# EAGLE board pcbqr (EAGLE 5.10)
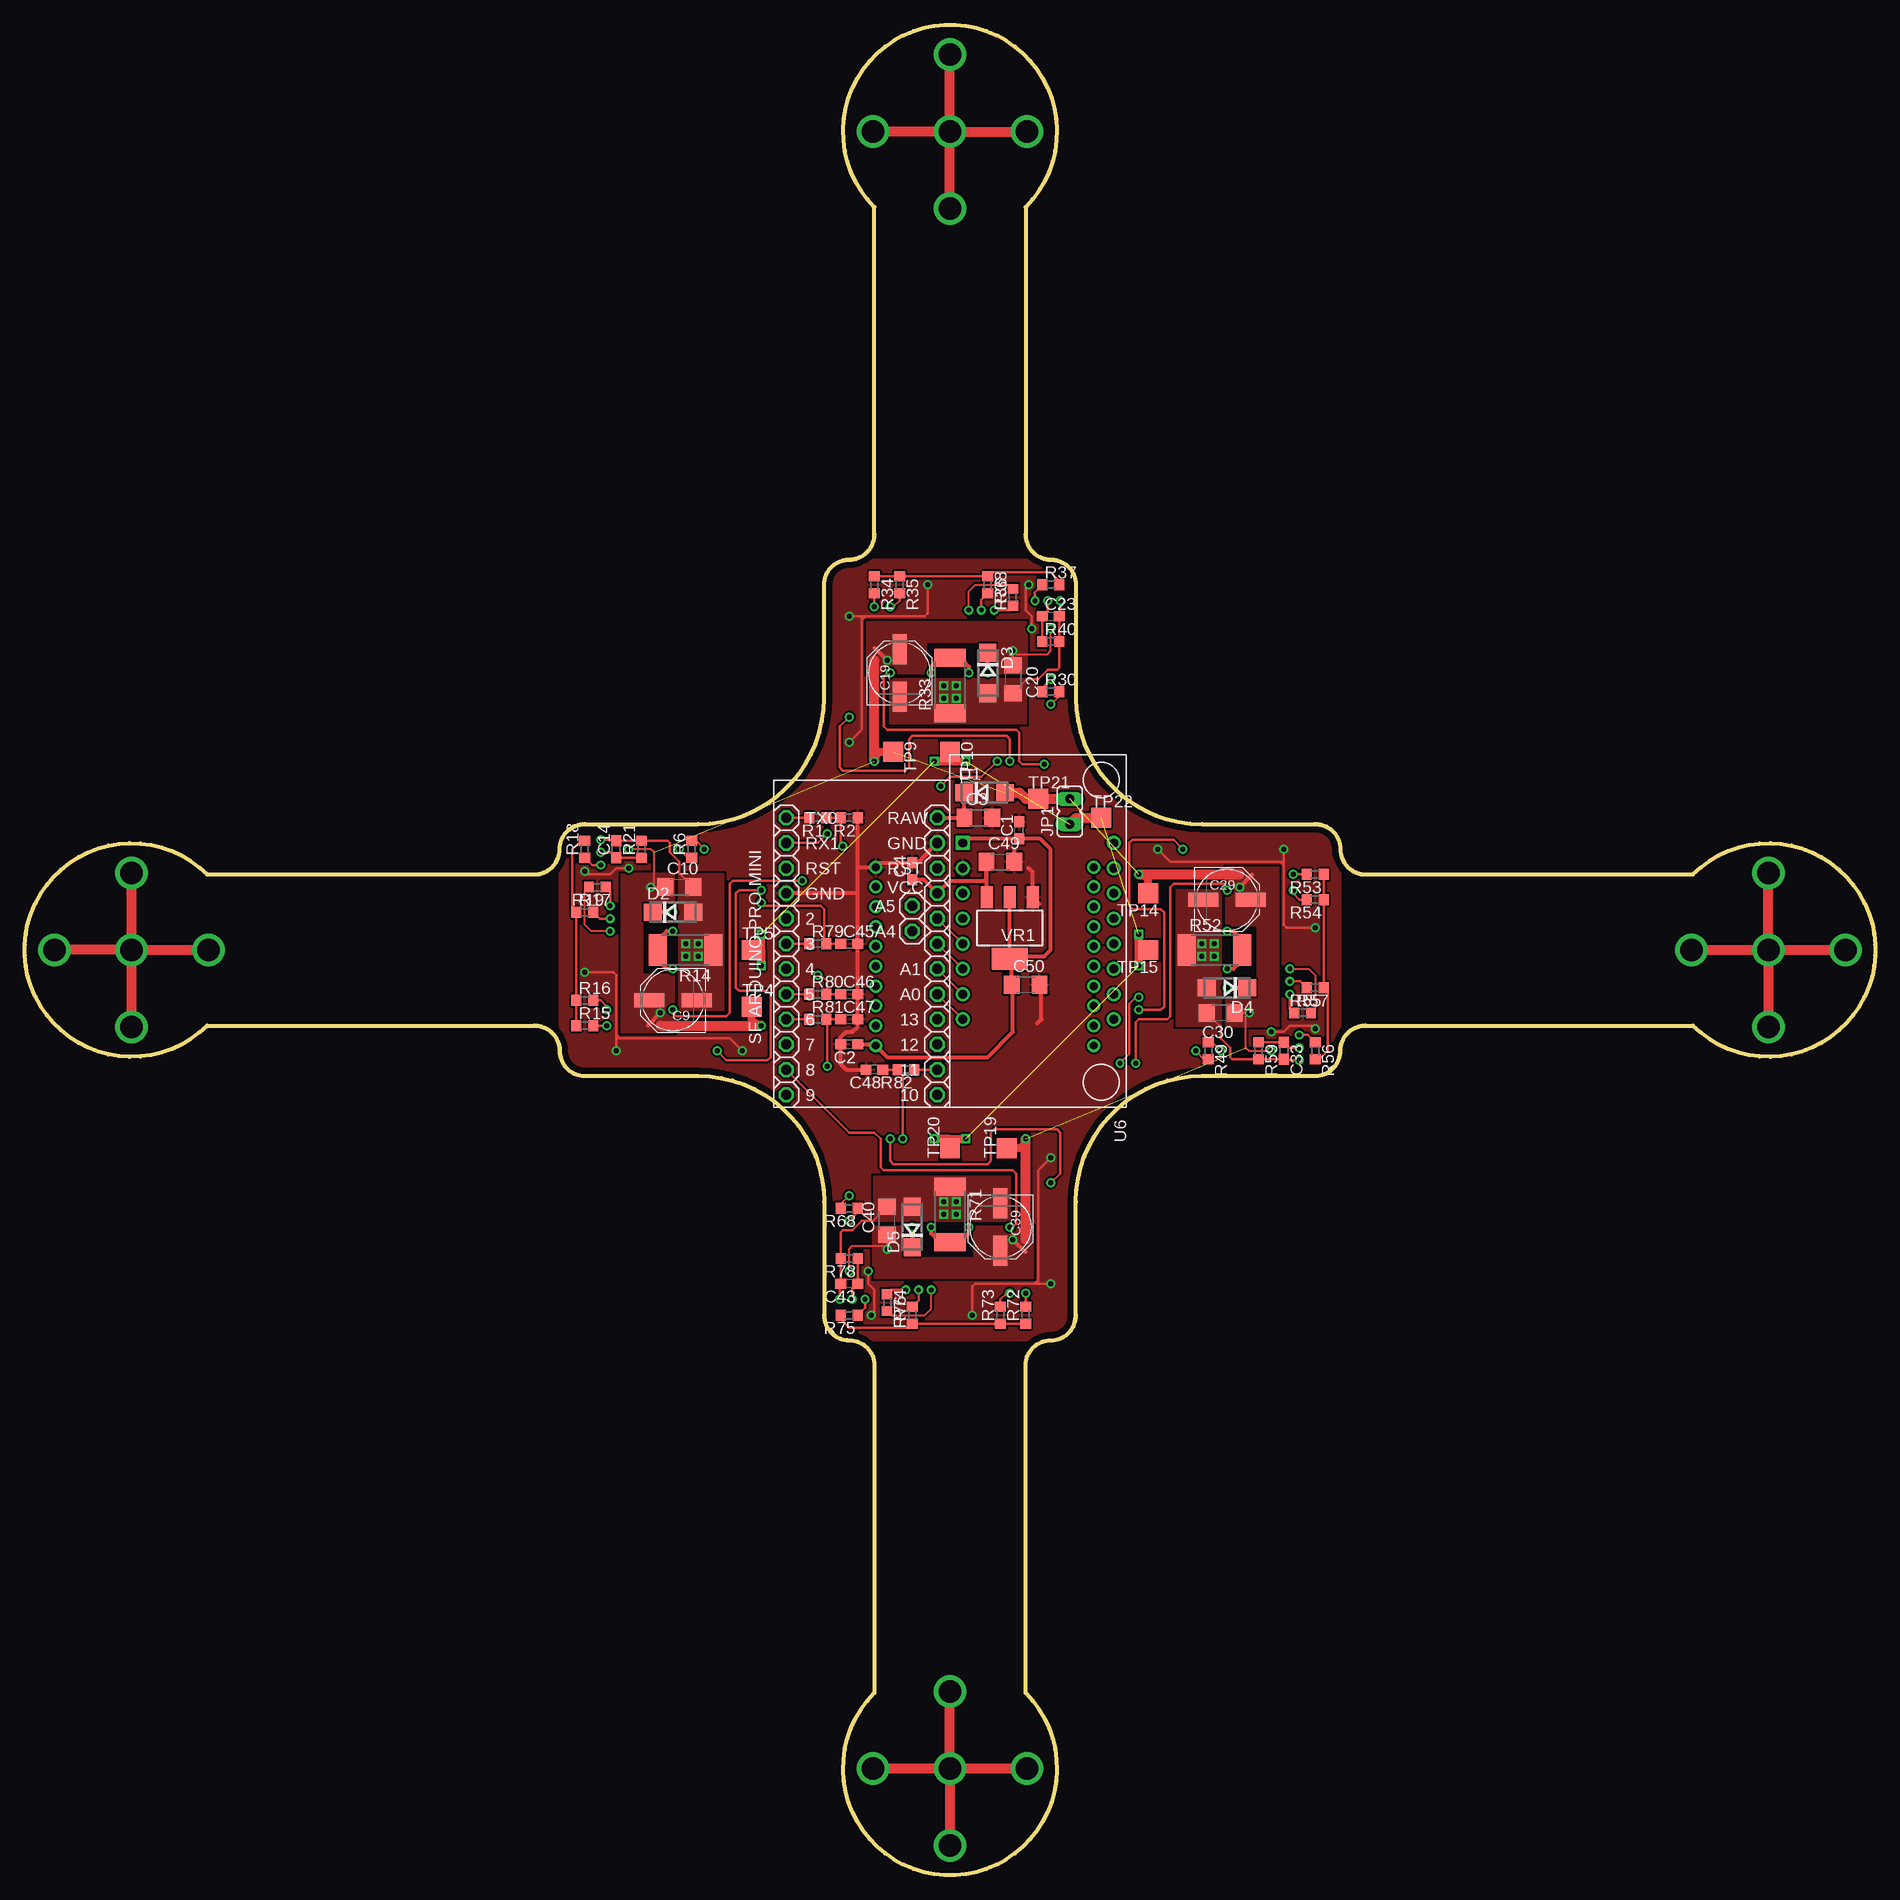
[diagram p0: board, top side]
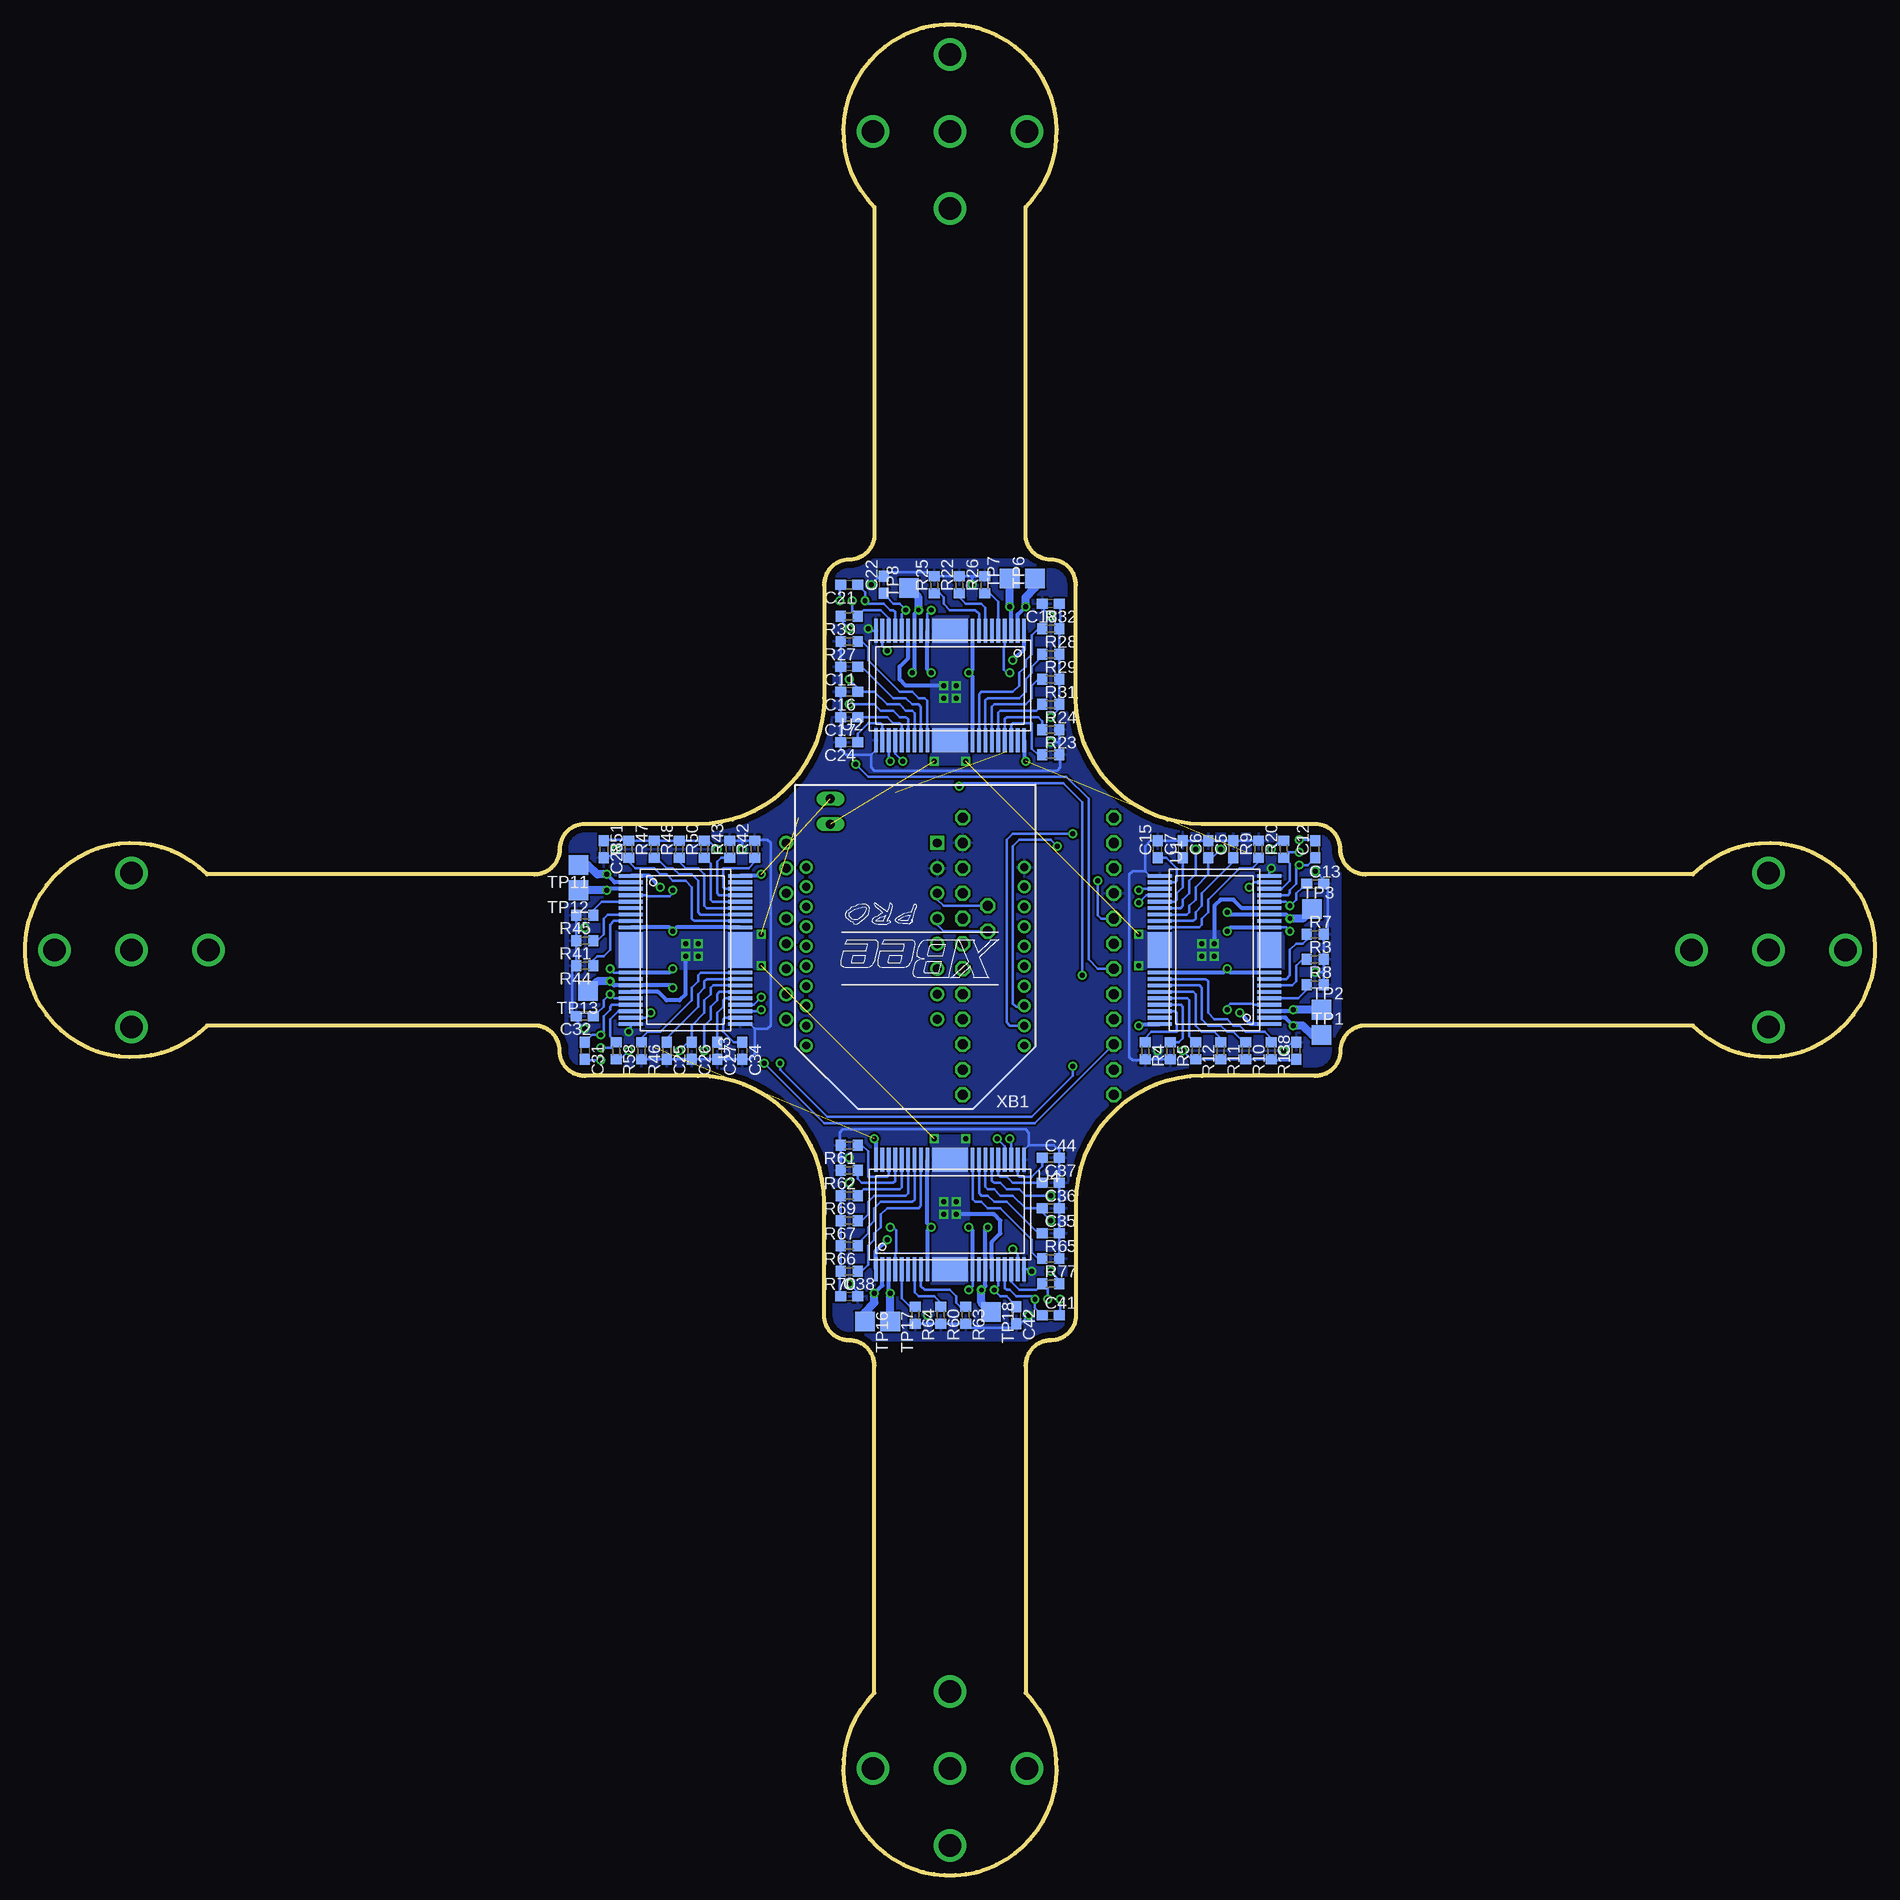
[diagram p1: board, bottom side, seen from below]

Size 186.63 x 186.63 mm. Coordinates in mm from the lower left corner, seen from the top.
Outline: 18.38,100.93 51.4,100.93 arc90 53.94,103.47 arc-90 56.48,106.01 67.91,106.01 arc90 80.61,118.71 80.61,130.14 arc-90 83.15,132.68 arc90 85.69,135.22 85.69,168.24 arc-270 100.93,168.24 100.93,135.22 arc90 103.47,132.68 arc-90 106.01,130.14 106.01,118.71 arc90 118.71,106.01 130.14,106.01 arc-90 132.68,103.47 arc90 135.22,100.93 168.24,100.93 arc-270 168.24,85.69 135.22,85.69 arc90 132.68,83.15 arc-90 130.14,80.61 118.71,80.61 arc90 106.01,67.91 106.01,56.48 arc-90 103.47,53.94 arc90 100.93,51.4 100.93,18.38 arc-270 85.69,18.38 85.69,51.4 arc90 83.15,53.94 arc-90 80.61,56.48 80.61,67.91 arc90 67.91,80.61 56.48,80.61 arc-90 53.94,83.15 arc90 51.4,85.69 18.38,85.69 arc-270 18.38,100.93
Copper layers (1*16): Top 0.035mm / dielectric 1.5mm / Bottom 0.035mm
Design rules "default *": minimum track width 8mil, minimum drill 19mil, track to track 8mil, track to pad 8mil, pad to pad 8mil, via to via 8mil, smd to smd 1mil, copper to edge 25mil, drill to drill 8mil, minimum pad ring 10mil, minimum via ring 8mil, stop-mask expansion 4mil, vias tented up to drill 0mil, thermal gap 10mil

## Footprints (pad centres in the part's own frame; a part is rotated, then mirrored left to right if it is on the bottom)
C0603 = smd 1.1 x 1: 1 -0.85,0; 2 0.85,0
C1206 = smd 1.6 x 1.8: 1 -1.4,0; 2 1.4,0
PANASONIC_D = smd 3 x 1.4: + 2.4,0; - -2.4,0
SMA = smd 1.8 x 1.7: A 2.05,0; C -2.05,0
JP1 = drill 0.914 long: 1 0,-1.27; 2 0,1.27
R0603 = smd 1 x 1.1: 1 -0.85,0; 2 0.85,0
R2512 = smd 1.8 x 3.2: 1 -2.8,0; 2 2.8,0
TP20SQ = smd 2 x 2: TP 0,0
HSOP36-P-450-0.65 = smd 0.38 x 2.4: 1 -7.475,-5.525; 2 -6.825,-5.525; 3 -6.175,-5.525; 4 -5.525,-5.525; 5 -4.875,-5.525; 6 -4.225,-5.525; 7 -3.575,-5.525; 8 -2.925,-5.525; 9 -2.275,-5.525; 10 2.275,-5.525; 11 2.925,-5.525; 12 3.575,-5.525; 13 4.225,-5.525; 14 4.875,-5.525; 15 5.525,-5.525; 16 6.175,-5.525; 17 6.825,-5.525; 18 7.475,-5.525; 19 7.475,5.525; 20 6.825,5.525; 21 6.175,5.525; 22 5.525,5.525; 23 4.875,5.525; 24 4.225,5.525; 25 3.575,5.525; 26 2.925,5.525; 27 2.275,5.525; 28 -2.275,5.525; 29 -2.925,5.525; 30 -3.575,5.525; 31 -4.225,5.525; 32 -4.875,5.525; 33 -5.525,5.525; 34 -6.175,5.525; 35 -6.825,5.525; 36 -7.475,5.525 | smd 3.6 x 2.4: P1 0,-5.525; P2 0,5.525
ARDUINO_PRO_MINI = drill 1.016 octagon: 2 0,17.78; 3 0,15.24; 4 0,12.7; 5 0,10.16; 6 0,7.62; 7 0,5.08; 8 0,2.54; 9 0,0; 10 15.24,0; 11 15.24,2.54; 12 15.24,5.08; 13 15.24,7.62; A0 15.24,10.16; A1 15.24,12.7; A2 15.24,15.24; A3 15.24,17.78; A4 12.7,16.51; A5 12.7,19.05; GND 0,20.32; GND@2 15.24,25.4; RAW 15.24,27.94; RST 0,22.86; RST@2 15.24,22.86; RX1 0,25.4; TX0 0,27.94; VCC 15.24,20.32
RAZOR_IMU = drill 0.9 square: 1 -8.89,-7.62 | drill 0.9 round: 2 -6.35,-7.62; 3 -3.81,-7.62; 4 -1.27,-7.62; 5 1.27,-7.62; 6 3.81,-7.62; 7 6.35,-7.62; 8 8.89,-7.62; 9 8.89,7.62; 10 6.35,7.62; 11 3.81,7.62; 12 1.27,7.62; 13 -1.27,7.62; 14 -3.81,7.62; 15 -6.35,7.62; 16 -8.89,7.62
SOT-223 = smd 1.219 x 2.235: 1 -2.311,-3.099; 2 0,-3.099; 3 2.311,-3.099 | smd 3.6 x 2.2: 4 0,3.099
XBEE-PRO = drill 0.8 pad 1.27 round: 1 -11,9; 2 -11,7; 3 -11,5; 4 -11,3; 5 -11,1; 6 -11,-1; 7 -11,-3; 8 -11,-5; 9 -11,-7; 10 -11,-9; 11 11,-9; 12 11,-7; 13 11,-5; 14 11,-3; 15 11,-1; 16 11,1; 17 11,3; 18 11,5; 19 11,7; 20 11,9

## Placement (x,y rotation side)
C1  0.1uF  [C0603]  100.3,105.38 90 top
C2  1uF  [C0603]  83.15,83.79 180 top
C3  10uF  [C1206]  96.17,106.65 0 top
C4  1uF  [C0603]  89.5,101.25 90 top
C5  100pF  [C0603]  64.74,103.47 90 bottom
C6  1uF  [C0603]  67.28,103.47 90 bottom
C7  0.1uF  [C0603]  69.82,103.47 90 bottom
C8  1uF  [C0603]  58.39,83.15 90 bottom
C9  68uF  [PANASONIC_D]  65.37,88.23 180 top
C10  10uF  [C1206]  66.01,99.66 0 top
C11  100pF  [C0603]  103.47,121.89 180 bottom
C12  DNP  [C0603]  56.48,103.47 90 bottom
C13  0.1uF  [C0603]  56.48,99.98 0 bottom
C14  0.1uF  [C0603]  59.66,103.47 90 top
C15  DNP  [C0603]  72.36,103.47 90 bottom
C16  1uF  [C0603]  103.47,119.35 180 bottom
C17  0.1uF  [C0603]  103.47,116.81 180 bottom
C18  1uF  [C0603]  83.15,128.24 180 bottom
C19  68uF  [PANASONIC_D]  88.23,121.25 90 top
C20  10uF  [C1206]  99.66,120.62 270 top
C21  DNP  [C0603]  103.47,130.14 180 bottom
C22  0.1uF  [C0603]  99.98,130.14 90 bottom
C23  0.1uF  [C0603]  103.47,126.97 0 top
C24  DNP  [C0603]  103.47,114.27 180 bottom
C25  100pF  [C0603]  121.89,83.15 270 bottom
C26  1uF  [C0603]  119.35,83.15 270 bottom
C27  0.1uF  [C0603]  116.81,83.15 270 bottom
C28  1uF  [C0603]  128.24,103.47 270 bottom
C29  68uF  [PANASONIC_D]  121.25,98.39 0 top
C30  10uF  [C1206]  120.62,86.96 180 top
C31  DNP  [C0603]  130.14,83.15 270 bottom
C32  0.1uF  [C0603]  130.14,86.65 180 bottom
C33  0.1uF  [C0603]  126.97,83.15 270 top
C34  DNP  [C0603]  114.27,83.15 270 bottom
C35  100pF  [C0603]  83.15,64.74 0 bottom
C36  1uF  [C0603]  83.15,67.28 0 bottom
C37  0.1uF  [C0603]  83.15,69.82 0 bottom
C38  1uF  [C0603]  103.47,58.39 0 bottom
C39  68uF  [PANASONIC_D]  98.39,65.37 270 top
C40  10uF  [C1206]  86.96,66.01 90 top
C41  DNP  [C0603]  83.15,56.48 0 bottom
C42  0.1uF  [C0603]  86.65,56.48 270 bottom
C43  0.1uF  [C0603]  83.15,59.66 180 top
C44  DNP  [C0603]  83.15,72.36 0 bottom
C45  0.1uF  [C0603]  83.15,93.95 0 top
C46  0.1uF  [C0603]  83.15,88.87 0 top
C47  0.1uF  [C0603]  83.15,86.33 0 top
C48  0.1uF  [C0603]  85.69,81.25 180 top
C49  10uF  [C1206]  98.39,102.2 0 top
C50  10uF  [C1206]  100.93,89.82 0 top
D1  SCHOTTKY_SMA  [SMA]  96.81,109.19 0 top
D2  SCHOTTKY_SMA  [SMA]  65.37,97.12 0 top
D3  SCHOTTKY_SMA  [SMA]  97.12,121.25 270 top
D4  SCHOTTKY_SMA  [SMA]  121.25,89.5 180 top
D5  SCHOTTKY_SMA  [SMA]  89.5,65.37 90 top
JP1  [JP1]  105.38,107.28 0 top
R1  1.69k  [R0603]  79.98,106.65 180 top
R2  3.3k  [R0603]  83.15,106.65 180 top
R3  DNP  [R0603]  56.48,92.36 0 bottom
R4  0  [R0603]  73.63,83.15 270 bottom
R5  0  [R0603]  71.09,83.15 270 bottom
R6  240k  [R0603]  67.28,103.47 90 top
R7  DNP  [R0603]  56.48,94.9 0 bottom
R8  0  [R0603]  56.48,89.82 0 bottom
R9  10k  [R0603]  62.2,103.47 90 bottom
R10  0  [R0603]  63.47,83.15 270 bottom
R11  0  [R0603]  66.01,83.15 270 bottom
R12  DNP  [R0603]  68.55,83.15 270 bottom
R13  10k  [R0603]  60.93,83.15 270 bottom
R14  0.2, 2W  [R2512]  66.64,93.31 180 top
R15  10k  [R0603]  56.48,85.69 0 top
R16  10k  [R0603]  56.48,88.23 0 top
R17  10k  [R0603]  56.48,97.12 0 top
R18  0  [R0603]  56.48,103.47 90 top
R19  10k  [R0603]  57.75,99.66 180 top
R20  10k  [R0603]  59.66,103.47 90 bottom
R21  10k  [R0603]  62.2,103.47 90 top
R22  DNP  [R0603]  92.36,130.14 90 bottom
R23  0  [R0603]  83.15,113 0 bottom
R24  0  [R0603]  83.15,115.54 0 bottom
R25  DNP  [R0603]  94.9,130.14 90 bottom
R26  0  [R0603]  89.82,130.14 90 bottom
R27  10k  [R0603]  103.47,124.43 180 bottom
R28  0  [R0603]  83.15,123.16 0 bottom
R29  0  [R0603]  83.15,120.62 0 bottom
R30  240k  [R0603]  103.47,119.35 0 top
R31  DNP  [R0603]  83.15,118.08 0 bottom
R32  10k  [R0603]  83.15,125.7 0 bottom
R33  0.2, 2W  [R2512]  93.31,119.98 90 top
R34  10k  [R0603]  85.69,130.14 270 top
R35  10k  [R0603]  88.23,130.14 270 top
R36  10k  [R0603]  97.12,130.14 270 top
R37  0  [R0603]  103.47,130.14 0 top
R38  10k  [R0603]  99.66,128.87 90 top
R39  10k  [R0603]  103.47,126.97 180 bottom
R40  10k  [R0603]  103.47,124.43 0 top
R41  DNP  [R0603]  130.14,94.27 180 bottom
R42  0  [R0603]  113,103.47 90 bottom
R43  0  [R0603]  115.54,103.47 90 bottom
R44  DNP  [R0603]  130.14,91.73 180 bottom
R45  0  [R0603]  130.14,96.81 180 bottom
R46  10k  [R0603]  124.43,83.15 270 bottom
R47  0  [R0603]  123.16,103.47 90 bottom
R48  0  [R0603]  120.62,103.47 90 bottom
R49  240k  [R0603]  119.35,83.15 270 top
R50  DNP  [R0603]  118.08,103.47 90 bottom
R51  10k  [R0603]  125.7,103.47 90 bottom
R52  0.2, 2W  [R2512]  119.98,93.31 0 top
R53  10k  [R0603]  130.14,100.93 180 top
R54  10k  [R0603]  130.14,98.39 180 top
R55  10k  [R0603]  130.14,89.5 180 top
R56  0  [R0603]  130.14,83.15 270 top
R57  10k  [R0603]  128.87,86.96 0 top
R58  10k  [R0603]  126.97,83.15 270 bottom
R59  10k  [R0603]  124.43,83.15 270 top
R60  DNP  [R0603]  94.27,56.48 270 bottom
R61  0  [R0603]  103.47,73.63 180 bottom
R62  0  [R0603]  103.47,71.09 180 bottom
R63  DNP  [R0603]  91.73,56.48 270 bottom
R64  0  [R0603]  96.81,56.48 270 bottom
R65  10k  [R0603]  83.15,62.2 0 bottom
R66  0  [R0603]  103.47,63.47 180 bottom
R67  0  [R0603]  103.47,66.01 180 bottom
R68  240k  [R0603]  83.15,67.28 180 top
R69  DNP  [R0603]  103.47,68.55 180 bottom
R70  10k  [R0603]  103.47,60.93 180 bottom
R71  0.2, 2W  [R2512]  93.31,66.64 270 top
R72  10k  [R0603]  100.93,56.48 90 top
R73  10k  [R0603]  98.39,56.48 90 top
R74  10k  [R0603]  89.5,56.48 90 top
R75  0  [R0603]  83.15,56.48 180 top
R76  10k  [R0603]  86.96,57.75 270 top
R77  10k  [R0603]  83.15,59.66 0 bottom
R78  10k  [R0603]  83.15,62.2 180 top
R79  3k  [R0603]  79.98,93.95 0 top
R80  3k  [R0603]  79.98,88.87 0 top
R81  3k  [R0603]  79.98,86.33 0 top
R82  3k  [R0603]  88.87,81.25 180 top
TP1  TPTP20SQ  [TP20SQ]  55.85,84.74 0 bottom
TP2  TPTP20SQ  [TP20SQ]  55.85,87.28 0 bottom
TP3  TPTP20SQ  [TP20SQ]  56.8,97.44 0 bottom
TP4  TPTP20SQ  [TP20SQ]  73.31,87.6 0 top
TP5  TPTP20SQ  [TP20SQ]  73.31,93.31 0 top
TP6  TPTP20SQ  [TP20SQ]  84.74,130.78 90 bottom
TP7  TPTP20SQ  [TP20SQ]  87.28,130.78 90 bottom
TP8  TPTP20SQ  [TP20SQ]  97.44,129.83 90 bottom
TP9  TPTP20SQ  [TP20SQ]  87.6,113.32 270 top
TP10  TPTP20SQ  [TP20SQ]  93.31,113.32 270 top
TP11  TPTP20SQ  [TP20SQ]  130.78,101.89 180 bottom
TP12  TPTP20SQ  [TP20SQ]  130.78,99.35 180 bottom
TP13  TPTP20SQ  [TP20SQ]  129.83,89.19 180 bottom
TP14  TPTP20SQ  [TP20SQ]  113.32,99.03 180 top
TP15  TPTP20SQ  [TP20SQ]  113.32,93.31 180 top
TP16  TPTP20SQ  [TP20SQ]  101.89,55.85 270 bottom
TP17  TPTP20SQ  [TP20SQ]  99.35,55.85 270 bottom
TP18  TPTP20SQ  [TP20SQ]  89.19,56.8 270 bottom
TP19  TPTP20SQ  [TP20SQ]  99.03,73.31 90 top
TP20  TPTP20SQ  [TP20SQ]  93.31,73.31 90 top
TP21  TPTP20SQ  [TP20SQ]  102.2,108.55 0 top
TP22  TPTP20SQ  [TP20SQ]  108.55,106.65 0 top
U1  TB6588FG  [HSOP36-P-450-0.65]  66.64,93.31 90 bottom
U2  TB6588FG  [HSOP36-P-450-0.65]  93.31,119.98 180 bottom
U3  TB6588FG  [HSOP36-P-450-0.65]  119.98,93.31 270 bottom
U4  TB6588FG  [HSOP36-P-450-0.65]  93.31,66.64 0 bottom
U5  ARDUINOPROMINI  [ARDUINO_PRO_MINI]  76.8,78.71 0 top
U6  RAZOR_IMU  [RAZOR_IMU]  102.2,95.22 270 top
VR1  LM1117  [SOT-223]  99.35,95.54 180 top
XB1  XBEE-PRO  [XBEE-PRO]  96.81,92.68 180 bottom

## Library data of the parts
C1-C50 R1-R82 = rcl
D1-D5 U1-U4 U6 VR1 = sc_usercreated
JP1 = jumper
TP1-TP22 = testpad
U5 = charleses_parts_bin
XB1 = maxstream

## Nets
+3V3: C1.1 C2.1 C50.1 U6.1 VR1.2 VR1.4 XB1.1
+5V: C4.1 C49.1 U5.VCC VR1.3
AX: U5.A0 U6.8
AY: U5.A1 U6.7
AZ: U5.A2 U6.6
DIR1: U1.4 U5.2
DIR2: U2.4 U5.4
DIR3: U3.4 U5.7
DIR4: U4.4 U5.8
GND: C1.2 C2.2 C3.2 C4.2 C5.2 C6.2 C7.2 C8.2 C11.2 C13.2 C15.2 C16.2 C17.2 C18.2 C22.2 C24.2 C25.2 C26.2 C27.2 C28.2 C32.2 C34.2 C35.2 C36.2 C37.2 C38.2 C42.2 C44.2 C45.2 C46.2 C47.2 C48.2 C49.2 C50.2 R2.1 R3.2 R4.2 R5.2 R7.2 R8.2 R9.2 R22.2 R23.2 R24.2 R25.2 R26.2 R27.2 R41.2 R42.2 R43.2 R44.2 R45.2 R46.2 R60.2 R61.2 R62.2 R63.2 R64.2 R65.2 U1.18 U1.19 U2.18 U2.19 U3.18 U3.19 U4.18 U4.19 U5.GND U5.GND@2 U6.2 VR1.1 XB1.10
GX: U5.A4 U6.4
GY: U5.A5 U6.3
GZ: U5.A3 U6.5
MAG1: C45.1 R79.2 U1.22
MAG1R: R79.1 U5.3
MAG2: C46.1 R80.2 U2.22
MAG2R: R80.1 U5.5
MAG3: C47.1 R81.2 U3.22
MAG3R: R81.1 U5.6
MAG4: C48.1 R82.2 U4.22
MAG4R: R82.1 U5.11
N$1: R1.1 R2.2 XB1.3
N$2: C3.1 D1.C U5.RAW
N$3: R15.1 R16.1 R17.1 R18.2
N$4: R14.2 R19.2 U1.9 U1.10 U1.28
N$5: R15.2 TP1.TP U1.2
N$6: R16.2 TP2.TP U1.3
N$7: D2.C R17.2 TP3.TP U1.12
N$8: R8.1 U1.5
N$9: R7.1 U1.8
N$10: R6.2 U1.24
N$11: R5.1 U1.33
N$12: R4.1 U1.34
N$13: R3.1 U1.7
N$14: C5.1 U1.26
N$15: R9.1 U1.27
N$16: R10.1 U1.30
N$17: R11.1 U1.31
N$18: C6.1 R6.1 U1.25
N$19: R12.1 U1.32
N$20: C7.1 U1.23
N$21: R13.1 U1.29
N$22: C14.1 R20.1 R21.1 U1.16
N$23: R33.2 R38.2 U2.9 U2.10 U2.28
N$24: C12.1 R18.1 U1.15
N$25: C13.1 R19.1 U1.14
N$26: C15.1 U1.20
N$27: R34.2 TP6.TP U2.2
N$28: R35.2 TP7.TP U2.3
N$29: D3.C R36.2 TP8.TP U2.12
N$30: R26.1 U2.5
N$31: R25.1 U2.8
N$32: R24.1 U2.33
N$33: R23.1 U2.34
N$34: R22.1 U2.7
N$35: C11.1 U2.26
N$36: R27.1 U2.27
N$37: R28.1 U2.30
N$38: R29.1 U2.31
N$39: R30.2 U2.24
N$40: C16.1 R30.1 U2.25
N$41: C17.1 U2.23
N$42: R31.1 U2.32
N$43: R32.1 U2.29
N$44: R34.1 R35.1 R36.1 R37.2
N$45: C21.1 R37.1 U2.15
N$46: C22.1 R38.1 U2.14
N$47: C23.1 R39.1 R40.1 U2.16
N$48: C24.1 U2.20
N$49: R52.2 R57.2 U3.9 U3.10 U3.28
N$50: R53.2 TP11.TP U3.2
N$51: R54.2 TP12.TP U3.3
N$52: D4.C R55.2 TP13.TP U3.12
N$53: R45.1 U3.5
N$54: R44.1 U3.8
N$55: R43.1 U3.33
N$56: R42.1 U3.34
N$57: R41.1 U3.7
N$58: C25.1 U3.26
N$59: R46.1 U3.27
N$60: R47.1 U3.30
N$61: R48.1 U3.31
N$62: R49.2 U3.24
N$63: C26.1 R49.1 U3.25
N$64: C27.1 U3.23
N$65: R50.1 U3.32
N$66: R51.1 U3.29
N$67: R53.1 R54.1 R55.1 R56.2
N$68: C31.1 R56.1 U3.15
N$69: C32.1 R57.1 U3.14
N$70: C33.1 R58.1 R59.1 U3.16
N$71: C34.1 U3.20
N$72: R71.2 R76.2 U4.9 U4.10 U4.28
N$73: R72.2 TP16.TP U4.2
N$74: R73.2 TP17.TP U4.3
N$75: D5.C R74.2 TP18.TP U4.12
N$76: R64.1 U4.5
N$77: R63.1 U4.8
N$78: R62.1 U4.33
N$79: R61.1 U4.34
N$80: R60.1 U4.7
N$81: C35.1 U4.26
N$82: R65.1 U4.27
N$83: R66.1 U4.30
N$84: R67.1 U4.31
N$85: R68.2 U4.24
N$86: C36.1 R68.1 U4.25
N$87: C37.1 U4.23
N$88: R69.1 U4.32
N$89: R70.1 U4.29
N$90: R72.1 R73.1 R74.1 R75.2
N$91: C41.1 R75.1 U4.15
N$92: C42.1 R76.1 U4.14
N$93: C43.1 R77.1 R78.1 U4.16
N$94: C44.1 U4.20
UC2XB: R1.2 U5.TX0
V+: C9.+ C10.1 C19.+ C20.1 C29.+ C30.1 C39.+ C40.1 D1.A JP1.2 R20.2 R39.2 R58.2 R77.2 TP4.TP TP9.TP TP14.TP TP19.TP TP21.TP U1.1 U1.17 U1.36 U2.1 U2.17 U2.36 U3.1 U3.17 U3.36 U4.1 U4.17 U4.36
V-: C9.- C10.2 C12.2 C14.2 C19.- C20.2 C21.2 C23.2 C29.- C30.2 C31.2 C33.2 C39.- C40.2 C41.2 C43.2 D2.A D3.A D4.A D5.A JP1.1 R14.1 R21.2 R33.1 R40.2 R52.1 R59.2 R71.1 R78.2 TP5.TP TP10.TP TP15.TP TP20.TP TP22.TP U1.13 U1.P1 U1.P2 U2.13 U2.P1 U2.P2 U3.13 U3.P1 U3.P2 U4.13 U4.P1 U4.P2
VR1: C8.1 R10.2 R11.2 R12.2 R13.2 U1.21
VR2: C18.1 R28.2 R29.2 R31.2 R32.2 U2.21
VR3: C28.1 R47.2 R48.2 R50.2 R51.2 U3.21
VR4: C38.1 R66.2 R67.2 R69.2 R70.2 U4.21
XB2UC: U5.RX1 XB1.2

## Tracks (layer width: path | path; a pad name or v marks a point on that pad's centre or on a via)
+3V3
  Top 0.406: VR1.4 99.53,92.25 C50.1 99.66,89.69 99.66,85.06 97.12,82.52 86.96,82.52 XB1.1 85.7,83.79 C2.1 | VR1.4 VR1.2 | VR1.4 99.59,92.68 102.84,92.68 103.47,93.31 103.47,103.47 102.42,104.53 C1.1 95,104.53 U6.1
+5V
  Top 0.406: C4.1 90.67,100.4 U5.VCC 93.31,100.3 96.81,100.3 96.99,100.48 C49.1 96.99,98.68 VR1.3
AX
  Top 0.254: U5.A0 U6.8
AY
  Top 0.254: U5.A1 U6.7
AZ
  Top 0.254: U5.A2 U6.6
DIR1  (via drill 0.5)
  Top 0.254: v65.37,87.28 65.37,86.96 65.69,86.65 70.77,86.65 71.09,86.96 71.09,99.98 71.4,100.3 v78.39,100.3
  Bottom 0.254: U1.4 62.7,87.79 62.83,87.91 65.06,87.91 65.37,87.6 v65.37,87.28 | v78.39,100.3 78.39,96.8 78.07,96.49 U5.2
DIR2  (via drill 0.5)
  Top 0.254: v87.28,121.25 86.96,121.25 86.64,120.94 86.64,115.86 86.96,115.54 99.98,115.54 100.3,115.22 100.3,112.36 100.62,112.04 v102.84,112.04
  Bottom 0.254: U2.4 87.79,123.92 87.92,123.79 87.92,121.57 87.6,121.25 v87.28,121.25 | U5.4 78.39,91.41 79.34,92.36 79.34,108.55 81.56,110.78 101.57,110.78 v102.84,112.04
DIR3  (via drill 0.5)
  Top 0.254: v121.25,99.35 121.25,99.66 120.94,99.98 115.86,99.98 115.54,99.66 115.54,86.65 115.22,86.33 112.36,86.33 112.05,86.01 v112.05,81.88
  Bottom 0.254: U3.4 123.92,98.84 123.79,98.71 121.57,98.71 121.25,99.03 v121.25,99.35 | U5.7 84.74,75.85 106.01,75.85 v112.05,81.88
DIR4  (via drill 0.5)
  Top 0.254: v99.34,65.37 99.66,65.37 99.98,65.69 99.98,70.77 99.66,71.09 86.64,71.09 86.33,71.4 86.33,74.26 85.69,74.9 83.15,74.9 U5.8
  Bottom 0.254: U4.4 98.84,62.7 98.71,62.83 98.71,65.06 99.03,65.37 v99.34,65.37
GND  (via drill 0.5)
  Top 0.254: v60.93,101.57 59.66,101.57 59.02,100.93 56.8,100.93 v56.48,101.25 | 59.66,84.74 59.97,84.42 71.09,84.42 v72.36,83.15 | 59.66,84.74 59.66,90.77 59.34,91.09 v56.48,91.09 | v59.66,83.15 59.66,84.74 | v101.57,125.7 101.57,126.97 100.93,127.6 100.93,129.82 v101.25,130.14 | 84.74,126.97 84.42,126.65 84.42,115.54 v83.15,114.27 | 84.74,126.97 90.77,126.97 91.09,127.29 v91.09,130.14 | 84.74,126.97 v83.15,126.97 | v125.7,85.06 126.97,85.06 127.6,85.69 129.83,85.69 v130.14,85.38 | 126.97,101.89 126.65,102.2 115.54,102.2 v114.27,103.47 | 126.97,101.89 126.97,95.85 127.28,95.54 v130.14,95.54 | 126.97,101.89 v126.97,103.47 | v85.06,60.93 85.06,59.66 85.69,59.02 85.69,56.8 v85.38,56.48 | 101.88,59.66 102.2,59.97 102.2,71.09 v103.47,72.36 | 101.88,59.66 95.85,59.66 95.53,59.34 v95.53,56.48 | 101.88,59.66 v103.47,59.66
  Top 0.406: 84,99.03 C45.2 C46.2 C47.2 84,85.59 83.47,85.06 82.84,85.06 82.2,84.42 82.2,83.89 C2.2 82.3,81.78 82.84,81.25 C48.2 | 84,99.03 84,101.57 | 84,101.57 R2.1 | U5.GND@2 90.03,102.1 C4.2 86.23,102.1 XB1.10 84.11,101.68 84,101.57 | C49.2 99.79,103.34 | 101.25,101.57 101.66,101.16 VR1.1 102.33,97.96 | 102.1,85.91 102.52,86.33 102.52,89.63 C50.2 | 84,99.03 U5.GND
  Bottom 0.254: 55.63,91.09 R8.2 | 55.63,91.09 R3.2 R7.2 55.21,95.22 55.21,99.66 55.32,99.66 C13.2 55.63,100.4 v56.48,101.25 | R9.2 C5.2 C6.2 C7.2 C15.2 73.09,104.32 73.63,103.79 73.63,101.25 | 72.36,82.3 R5.2 70.67,82.3 | 72.36,82.3 R4.2 | U1.18 61.12,101.38 v60.93,101.57 | v56.48,91.09 55.63,91.09 | v72.36,83.15 72.36,82.3 | U1.19 73.17,100.79 73.63,101.25 | 73.63,82.2 74.9,82.2 75.22,82.52 75.22,100.93 74.9,101.25 73.63,101.25 | C8.2 58.81,84 v59.66,83.15 | 91.09,130.99 R26.2 | 91.09,130.99 R22.2 R25.2 95.22,131.41 99.66,131.41 99.66,131.31 C22.2 100.4,130.99 v101.25,130.14 | R27.2 C11.2 C16.2 C17.2 C24.2 104.32,113.53 103.79,113 101.25,113 | 82.3,114.27 R24.2 82.3,115.96 | R23.2 82.3,114.27 | U2.18 101.38,125.51 v101.57,125.7 | v91.09,130.14 91.09,130.99 | 82.3,114.27 v83.15,114.27 | U2.19 100.79,113.46 101.25,113 | 82.2,113 82.2,111.73 82.52,111.41 100.93,111.41 101.25,111.73 101.25,113 | C18.2 84,127.82 v83.15,126.97 | 130.99,95.54 R45.2 | 130.99,95.54 R41.2 R44.2 131.41,91.41 131.41,86.96 131.31,86.96 C32.2 130.99,86.22 v130.14,85.38 | R46.2 C25.2 C26.2 C27.2 C34.2 113.53,82.3 113,82.83 113,85.38 | 114.27,104.32 R43.2 115.96,104.32 | 114.27,104.32 R42.2 | U3.18 125.51,85.25 v125.7,85.06 | 130.99,95.54 v130.14,95.54 | v114.27,103.47 114.27,104.32 | U3.19 113.46,85.84 113,85.38 | 113,104.43 111.73,104.43 111.41,104.11 111.41,85.69 111.73,85.38 113,85.38 | C28.2 127.82,102.62 v126.97,103.47 | 95.53,55.63 R64.2 | 95.53,55.63 R60.2 R63.2 91.41,55.21 86.96,55.21 86.96,55.32 C42.2 86.23,55.63 v85.38,56.48 | R65.2 C35.2 C36.2 C37.2 C44.2 82.3,73.09 82.84,73.63 85.38,73.63 | 104.32,72.36 R62.2 104.32,70.67
  Bottom 0.254: 104.32,72.36 R61.2 | U4.18 85.25,61.12 v85.06,60.93 | 95.53,55.63 v95.53,56.48 | v103.47,72.36 104.32,72.36 | U4.19 85.84,73.17 85.38,73.63 | 104.42,73.63 104.42,74.9 104.11,75.22 85.69,75.22 85.38,74.9 85.38,73.63 | C38.2 102.62,58.81 v103.47,59.66
  pour Bottom (rank 2): 53.94,103.47 53.94,54.2 arc90 54.2,53.94 131.41,53.94 131.79,53.94 arc90 132.05,54.2 132.05,132.68 54.2,132.68 arc90 53.94,132.43
  pour Top (rank 2): 53.94,103.47 53.94,132.68 132.05,132.68 132.68,132.68 132.68,53.94 53.94,53.94
GX
  Bottom 0.254: U6.4 94.58,95.85 93.95,95.22 U5.A4
GY
  Bottom 0.254: U6.3 94.58,98.39 93.95,97.76 U5.A5
GZ
  Top 0.254: U5.A3 U6.5
M1  (via drill 2.26)
  Top 1.016: v10.76,93.31 v10.76,101.08 | v10.76,93.31 10.13,93.31 v2.99,93.31 | v10.76,85.54 v10.76,93.31 | v10.76,93.31 v18.53,93.31
M2  (via drill 2.26)
  Top 1.016: v93.31,175.86 v85.54,175.86 | v93.31,175.86 v93.31,183.63 | 93.95,175.86 v93.31,175.86 | 93.95,175.86 v101.08,175.86 | v93.31,168.09 93.31,175.23 93.95,175.86
M3  (via drill 2.26)
  Top 1.016: v168.09,93.31 175.23,93.31 | 175.23,93.31 v175.86,93.31 175.86,93.95 | 175.86,93.95 v175.86,101.08 | v183.63,93.31 176.5,93.31 175.86,93.95 | v175.86,85.54 175.86,92.68 175.23,93.31
M4  (via drill 2.26)
  Top 1.016: v85.54,10.76 v93.31,10.76 | v93.31,10.76 v93.31,18.53 | v93.31,10.76 v101.08,10.76 | v93.31,10.76 v93.31,2.99
MAG1  (via drill 0.5)
  Top 0.254: C45.1 R79.2 80.61,94.16 80.61,97.44 80.3,97.76 74.58,97.76 v74.26,98.08
  Bottom 0.254: U1.22 73.5,98.84 v74.26,98.08
MAG1R
  Top 0.254: R79.1 U5.3
MAG2  (via drill 0.5)
  Top 0.254: C46.1 R80.2 80.93,88.97 80.93,90.14 80.3,90.77 v79.98,90.77 | v98.07,112.36 96.49,110.78 93.31,110.78 v92.36,109.82
  Bottom 0.254: U2.22 98.84,113.12 v98.07,112.36 | v92.36,109.82 92.04,110.14 81.88,110.14 79.98,108.23 v79.98,90.77
MAG2R
  Top 0.254: R80.1 U5.5
MAG3  (via drill 0.5)
  Top 0.254: C47.1 R81.2 80.93,86.22 v80.93,81.56 | v112.36,88.55 112.05,88.55 111.41,87.91 111.41,82.83 v110.46,81.88
  Bottom 0.254: U3.22 113.13,87.79 v112.36,88.55 | v110.46,81.88 110.46,81.25 105.7,76.49 85.06,76.49 80.93,80.61 v80.93,81.56
MAG3R
  Top 0.254: R81.1 U5.6
MAG4  (via drill 0.5)
  Top 0.254: C48.1 R82.2 88.55,80.72 v88.55,74.26
  Bottom 0.254: U4.22 87.79,73.5 v88.55,74.26
MAG4R
  Top 0.254: R82.1 U5.11
N$1  (via drill 0.5)
  Top 0.254: R1.1 R2.2 82.3,104 v82.52,103.79
  Bottom 0.254: v82.52,103.79 83.15,104.43 86.33,104.43 86.96,103.79 86.96,87.91 86.64,87.6 85.88,87.6 XB1.3
N$2
  Top 0.406: U5.RAW C3.1 94.77,109.17 D1.C
N$3
  Top 0.254: R15.1 R16.1 R17.1 55.21,97.54 55.21,103.47 55.85,104.11 56.27,104.11 R18.2
N$4  (via drill 0.5)
  Top 0.203: v59.02,95.22 57.12,95.22 56.48,95.85 56.48,99.24 R19.2
  Top 0.381: v65.37,95.22 64.74,95.22 64.1,94.58 64.1,93.57 | v65.37,91.41 64.74,91.41 64.1,92.04
  Top 0.406: 64.1,93.57 R14.2 64.1,93.05 64.1,92.04
  Bottom 0.254: U1.10 59.39,95.59 v59.02,95.22
  Bottom 0.381: U1.10 65,95.59 v65.37,95.22 | U1.9 65,91.04 v65.37,91.41 65.74,91.04 U1.28
N$5  (via drill 0.5)
  Top 0.254: v58.7,85.69 R15.2
  Bottom 0.406: U1.2 59.5,86.49 v58.7,85.69
  Bottom 0.813: TP1.TP 56.8,84.74 57.75,85.69 v58.7,85.69
N$6  (via drill 0.5)
  Top 0.254: v58.7,87.28 58.7,87.6 58.07,88.23 R16.2
  Bottom 0.406: U1.3 58.85,87.14 v58.7,87.28
  Bottom 0.813: TP2.TP v58.7,87.28
N$7  (via drill 0.5)
  Top 0.254: v59.02,96.49 57.97,96.49 R17.2
  Top 0.381: v65.37,97.12 D2.C
  Bottom 0.381: U1.12 65.14,96.89 v65.37,97.12
  Bottom 0.406: U1.12 59.42,96.89 v59.02,96.49
  Bottom 0.813: TP3.TP 57.75,96.49 v59.02,96.49
N$8
  Bottom 0.254: U1.5 58.18,88.44 57.33,89.29 R8.1
N$9
  Bottom 0.254: U1.8 59.41,90.39 59.02,90.77 59.02,93.31 58.39,93.95 57.75,93.95 57.33,94.37 R7.1 57.33,95
N$10  (via drill 0.5)
  Top 0.254: v68.55,103.47 67.7,104.32 R6.2
  Bottom 0.254: U1.24 70.04,97.54 69.82,97.76 69.82,98.39 69.18,99.03 69.18,100.3 68.55,100.93 v68.55,103.47
N$11
  Bottom 0.254: U1.33 70.01,87.79 69.82,87.6 69.82,84.42 70.24,84 R5.1
N$12
  Bottom 0.254: U1.34 70.63,87.14 70.45,86.96 70.45,85.06 72.99,85.06 73.63,84.42 R4.1
N$13
  Bottom 0.254: U1.7 58.79,89.74 58.39,90.14 58.39,91.72 57.75,92.36 R3.1
N$14
  Bottom 0.254: U1.26 68.8,96.24 68.55,96.49 68.55,97.12 67.91,97.76 67.91,99.03 64.74,102.2 C5.1
N$15
  Bottom 0.254: U1.27 68.18,95.59 67.91,95.85 67.91,96.49 67.28,97.12 67.28,98.39 64.1,101.57 62.83,101.57 62.2,102.2 R9.1
N$16
  Bottom 0.254: U1.30 68.15,89.74 67.91,89.5 67.91,86.33 67.28,85.69 66.01,85.69 65.37,85.06 64.74,85.06 63.68,84 R10.1
N$17
  Bottom 0.254: U1.31 68.77,89.09 68.55,88.87 68.55,85.69 67.91,85.06 66.64,85.06 66.01,84.42 R11.1
N$18  (via drill 0.5)
  Top 0.254: v66.01,103.47 66.86,102.62 C6.1
  Bottom 0.254: U1.25 69.42,96.89 69.18,97.12 69.18,97.76 68.55,98.39 68.55,99.66 67.28,100.93 C6.1 66.86,102.62 v66.01,103.47
N$19
  Bottom 0.254: U1.32 69.39,88.44 69.18,88.23 69.18,84.64 R12.1
N$20
  Bottom 0.254: U1.23 70.66,98.19 70.45,98.39 70.45,99.03 69.82,99.66 C7.1
N$21
  Bottom 0.254: U1.29 67.53,90.39 67.28,90.14 67.28,86.96 66.64,86.33 65.37,86.33 64.74,85.69 64.1,85.69 63.47,85.06 61.56,85.06 60.93,84.42 R13.1
N$22  (via drill 0.5)
  Top 0.254: R21.1 C14.1 59.12,103.15 v58.07,103.15
  Bottom 0.254: U1.16 59.83,99.49 59.02,100.3 59.02,101.99 C14.1 59.12,103.15 v58.07,103.15
N$23  (via drill 0.5)
  Top 0.203: v95.22,127.6 95.22,129.51 95.85,130.14 99.24,130.14 R38.2
  Top 0.381: v95.22,121.25 95.22,121.89 94.58,122.52 93.57,122.52 | v91.41,121.25 91.41,121.89 92.04,122.52
  Top 0.406: 93.57,122.52 R33.2 93.05,122.52 92.04,122.52
  Bottom 0.254: U2.10 95.59,127.23 v95.22,127.6
  Bottom 0.381: U2.10 95.59,121.62 v95.22,121.25 | U2.9 91.04,121.62 v91.41,121.25 91.04,120.88 U2.28
N$24  (via drill 0.5)
  Top 0.254: C12.1 57.22,101.89 v58.07,101.89
  Bottom 0.254: U1.15 59.21,98.84 59.02,99.03 59.02,99.35 58.39,99.98 58.39,101.57 v58.07,101.89 57.22,101.89 C12.1
N$25  (via drill 0.5)
  Top 0.254: v59.02,97.76 59.02,99.24 R19.1
  Bottom 0.254: U1.14 59.45,98.19 v59.02,97.76 58.39,98.39 58.39,99.03 57.75,99.66 57.65,99.66 C13.1 57.33,100.08
N$26
  Bottom 0.254: U1.20 70.61,100.14 70.45,100.3 70.45,101.57 71.51,102.62 C15.1
N$27  (via drill 0.5)
  Top 0.254: v85.69,127.92 R34.2
  Bottom 0.406: U2.2 86.49,127.13 v85.69,127.92
  Bottom 0.813: TP6.TP 84.74,129.82 85.69,128.87 v85.69,127.92
N$28  (via drill 0.5)
  Top 0.254: v87.28,127.92 87.6,127.92 88.23,128.55 R35.2
  Bottom 0.406: U2.3 87.14,127.78 v87.28,127.92
  Bottom 0.813: v87.28,127.92 TP7.TP
N$29  (via drill 0.5)
  Top 0.254: v96.49,127.6 96.49,128.66 R36.2
  Top 0.381: v97.12,121.25 D3.C
  Bottom 0.381: U2.12 96.89,121.49 v97.12,121.25
  Bottom 0.406: U2.12 96.89,127.2 v96.49,127.6
  Bottom 0.813: TP8.TP 96.49,128.87 v96.49,127.6
N$30
  Bottom 0.254: U2.5 88.44,128.44 89.29,129.29 R26.1
N$31
  Bottom 0.254: U2.8 90.39,127.22 90.77,127.6 93.31,127.6 93.95,128.24 93.95,128.87 94.37,129.29 R25.1 95,129.29
N$32
  Bottom 0.254: U2.33 87.79,116.62 87.6,116.81 84.42,116.81 84,116.39 R24.1
N$33
  Bottom 0.254: U2.34 87.14,116 86.96,116.17 85.06,116.17 85.06,113.63 84.42,113 R23.1
N$34
  Bottom 0.254: U2.7 89.74,127.84 90.14,128.24 91.73,128.24 92.36,128.87 R22.1
N$35
  Bottom 0.254: U2.26 96.24,117.83 96.49,118.08 97.12,118.08 97.76,118.71 99.03,118.71 102.2,121.89 C11.1
N$36
  Bottom 0.254: U2.27 95.59,118.45 95.85,118.71 96.49,118.71 97.12,119.35 98.39,119.35 101.57,122.52 101.57,123.79 102.2,124.43 R27.1
N$37
  Bottom 0.254: U2.30 89.74,118.48 89.5,118.71 86.33,118.71 85.69,119.35 85.69,120.62 85.06,121.25 85.06,121.89 84,122.94 R28.1
N$38
  Bottom 0.254: U2.31 89.09,117.86 88.87,118.08 85.69,118.08 85.06,118.71 85.06,119.98 84.42,120.62 R29.1
N$39  (via drill 0.5)
  Top 0.254: v103.47,118.08 104.32,118.93 R30.2
  Bottom 0.254: U2.24 97.54,116.59 97.76,116.81 98.39,116.81 99.03,117.44 100.3,117.44 100.93,118.08 v103.47,118.08
N$40  (via drill 0.5)
  Top 0.254: v103.47,120.62 102.62,119.77 C16.1
  Bottom 0.254: U2.25 96.89,117.21 97.12,117.44 97.76,117.44 98.39,118.08 99.66,118.08 100.93,119.35 C16.1 102.62,119.77 v103.47,120.62
N$41
  Bottom 0.254: U2.23 98.19,115.97 98.39,116.17 99.03,116.17 99.66,116.81 C17.1
N$42
  Bottom 0.254: U2.32 88.44,117.24 88.23,117.44 84.64,117.44 R31.1
N$43
  Bottom 0.254: U2.29 90.39,119.1 90.14,119.35 86.96,119.35 86.33,119.98 86.33,121.25 85.69,121.89 85.69,122.52 85.06,123.16 85.06,125.06 84.42,125.7 R32.1
N$44
  Top 0.254: R34.1 R35.1 R36.1 97.54,131.41 103.47,131.41 104.11,130.78 104.11,130.36 R37.2
N$45  (via drill 0.5)
  Top 0.254: C21.1 101.88,129.41 v101.88,128.55
  Bottom 0.254: U2.15 98.84,127.41 99.03,127.6 99.34,127.6 99.98,128.24 101.57,128.24 v101.88,128.55 101.88,129.41 C21.1
N$46  (via drill 0.5)
  Top 0.254: v97.76,127.6 99.24,127.6 R38.1
  Bottom 0.254: U2.14 98.19,127.17 v97.76,127.6 98.39,128.24 99.03,128.24 99.66,128.87 99.66,128.97 C22.1 100.08,129.29
N$47  (via drill 0.5)
  Top 0.254: R40.1 C23.1 103.16,127.5 v103.16,128.55
  Bottom 0.254: U2.16 99.49,126.79 100.3,127.6 101.99,127.6 C23.1 103.16,127.5 v103.16,128.55
N$48
  Bottom 0.254: U2.20 100.14,116.01 100.3,116.17 101.57,116.17 102.62,115.12 C24.1
N$49  (via drill 0.5)
  Top 0.203: v127.6,91.41 129.51,91.41 130.14,90.77 130.14,87.38 R57.2
  Top 0.381: v121.25,91.41 121.89,91.41 122.52,92.04 122.52,93.05 | v121.25,95.22 121.89,95.22 122.52,94.58
  Top 0.406: 122.52,93.05 R52.2 122.52,93.57 122.52,94.58
  Bottom 0.254: U3.10 127.23,91.04 v127.6,91.41
  Bottom 0.381: U3.10 121.62,91.04 v121.25,91.41 | U3.9 121.62,95.59 v121.25,95.22 120.88,95.59 U3.28
N$50  (via drill 0.5)
  Top 0.254: v127.92,100.93 R53.2
  Bottom 0.406: U3.2 127.13,100.14 v127.92,100.93
  Bottom 0.813: TP11.TP 129.83,101.89 128.87,100.93 v127.92,100.93
N$51  (via drill 0.5)
  Top 0.254: v127.92,99.35 127.92,99.03 128.55,98.39 R54.2
  Bottom 0.406: U3.3 127.78,99.49 v127.92,99.35
  Bottom 0.813: v127.92,99.35 TP12.TP
N$52  (via drill 0.5)
  Top 0.254: v127.6,90.14 128.66,90.14 R55.2
  Top 0.381: v121.25,89.5 D4.C
  Bottom 0.381: U3.12 121.49,89.74 v121.25,89.5
  Bottom 0.406: U3.12 127.2,89.74 v127.6,90.14
  Bottom 0.813: TP13.TP 128.87,90.14 v127.6,90.14
N$53
  Bottom 0.254: U3.5 128.44,98.19 129.29,97.34 R45.1
N$54
  Bottom 0.254: U3.8 127.22,96.24 127.6,95.85 127.6,93.31 128.24,92.68 128.87,92.68 129.29,92.26 R44.1 129.29,91.62
N$55
  Bottom 0.254: U3.33 116.62,98.84 116.81,99.03 116.81,102.2 116.39,102.62 R43.1
N$56
  Bottom 0.254: U3.34 116,99.49 116.17,99.66 116.17,101.57 113.63,101.57 113,102.2 R42.1
N$57
  Bottom 0.254: U3.7 127.84,96.89 128.24,96.49 128.24,94.9 128.87,94.26 R41.1
N$58
  Bottom 0.254: U3.26 117.83,90.39 118.08,90.14 118.08,89.5 118.71,88.87 118.71,87.6 121.89,84.42 C25.1
N$59
  Bottom 0.254: U3.27 118.45,91.04 118.71,90.77 118.71,90.14 119.35,89.5 119.35,88.23 122.52,85.06 123.79,85.06 124.43,84.42 R46.1
N$60
  Bottom 0.254: U3.30 118.48,96.89 118.71,97.12 118.71,100.3 119.35,100.93 120.62,100.93 121.25,101.57 121.89,101.57 122.94,102.62 R47.1
N$61
  Bottom 0.254: U3.31 117.86,97.54 118.08,97.76 118.08,100.93 118.71,101.57 119.98,101.57 120.62,102.2 R48.1
N$62  (via drill 0.5)
  Top 0.254: v118.08,83.15 118.93,82.3 R49.2
  Bottom 0.254: U3.24 116.59,89.09 116.81,88.87 116.81,88.23 117.44,87.6 117.44,86.33 118.08,85.69 v118.08,83.15
N$63  (via drill 0.5)
  Top 0.254: v120.62,83.15 119.77,84 C26.1
  Bottom 0.254: U3.25 117.21,89.74 117.44,89.5 117.44,88.87 118.08,88.23 118.08,86.96 119.35,85.69 C26.1 119.77,84 v120.62,83.15
N$64
  Bottom 0.254: U3.23 115.97,88.44 116.17,88.23 116.17,87.6 116.81,86.96 C27.1
N$65
  Bottom 0.254: U3.32 117.24,98.19 117.44,98.39 117.44,101.99 R50.1
N$66
  Bottom 0.254: U3.29 119.1,96.24 119.35,96.49 119.35,99.66 119.98,100.3 121.25,100.3 121.89,100.93 122.52,100.93 123.16,101.57 125.06,101.57 125.7,102.2 R51.1
N$67
  Top 0.254: R53.1 R54.1 R55.1 131.41,89.08 131.41,83.15 130.78,82.52 130.36,82.52 R56.2
N$68  (via drill 0.5)
  Top 0.254: C31.1 129.41,84.74 v128.55,84.74
  Bottom 0.254: U3.15 127.41,87.79 127.6,87.6 127.6,87.28 128.24,86.65 128.24,85.06 v128.55,84.74 129.41,84.74 C31.1
N$69  (via drill 0.5)
  Top 0.254: v127.6,88.87 127.6,87.38 R57.1
  Bottom 0.254: U3.14 127.17,88.44 v127.6,88.87 128.24,88.23 128.24,87.6 128.87,86.96 128.97,86.96 C32.1 129.29,86.54
N$70  (via drill 0.5)
  Top 0.254: R59.1 C33.1 127.5,83.47 v128.55,83.47
  Bottom 0.254: U3.16 126.79,87.14 127.6,86.33 127.6,84.64 C33.1 127.5,83.47 v128.55,83.47
N$71
  Bottom 0.254: U3.20 116.01,86.49 116.17,86.33 116.17,85.06 115.12,84 C34.1
N$72  (via drill 0.5)
  Top 0.203: v91.41,59.02 91.41,57.12 90.77,56.48 87.38,56.48 R76.2
  Top 0.381: v91.41,65.37 91.41,64.74 92.04,64.1 93.05,64.1 | v95.22,65.37 95.22,64.74 94.58,64.1
  Top 0.406: 93.05,64.1 R71.2 93.57,64.1 94.58,64.1
  Bottom 0.254: U4.10 91.04,59.39 v91.41,59.02
  Bottom 0.381: U4.10 91.04,65 v91.41,65.37 | U4.9 95.59,65 v95.22,65.37 95.59,65.74 U4.28
N$73  (via drill 0.5)
  Top 0.254: v100.93,58.71 R72.2
  Bottom 0.406: U4.2 100.14,59.5 v100.93,58.71
  Bottom 0.813: TP16.TP 101.88,56.8 100.93,57.75 v100.93,58.71
N$74  (via drill 0.5)
  Top 0.254: v99.34,58.71 99.03,58.71 98.39,58.07 R73.2
  Bottom 0.406: U4.3 99.49,58.85 v99.34,58.71
  Bottom 0.813: TP17.TP v99.34,58.71
N$75  (via drill 0.5)
  Top 0.254: v90.14,59.02 90.14,57.97 R74.2
  Top 0.381: v89.5,65.37 D5.C
  Bottom 0.381: U4.12 89.74,65.14 v89.5,65.37
  Bottom 0.406: U4.12 89.74,59.42 v90.14,59.02
  Bottom 0.813: TP18.TP 90.14,57.75 v90.14,59.02
N$76
  Bottom 0.254: U4.5 98.19,58.18 97.34,57.33 R64.1
N$77
  Bottom 0.254: U4.8 96.24,59.41 95.85,59.02 93.31,59.02 92.68,58.39 92.68,57.75 92.26,57.33 R63.1 91.62,57.33
N$78
  Bottom 0.254: U4.33 98.84,70.01 99.03,69.82 102.2,69.82 102.62,70.24 R62.1
N$79
  Bottom 0.254: U4.34 99.49,70.63 99.66,70.45 101.57,70.45 101.57,72.99 102.2,73.63 R61.1
N$80
  Bottom 0.254: U4.7 96.89,58.79 96.49,58.39 94.9,58.39 94.27,57.75 R60.1
N$81
  Bottom 0.254: U4.26 90.39,68.8 90.14,68.55 89.5,68.55 88.87,67.91 87.6,67.91 84.42,64.74 C35.1
N$82
  Bottom 0.254: U4.27 91.04,68.18 90.77,67.91 90.14,67.91 89.5,67.28 88.23,67.28 85.06,64.1 85.06,62.83 84.42,62.2 R65.1
N$83
  Bottom 0.254: U4.30 96.89,68.15 97.12,67.91 100.3,67.91 100.93,67.28 100.93,66.01 101.57,65.37 101.57,64.74 102.62,63.68 R66.1
N$84
  Bottom 0.254: U4.31 97.54,68.77 97.76,68.55 100.93,68.55 101.57,67.91 101.57,66.64 102.2,66.01 R67.1
N$85  (via drill 0.5)
  Top 0.254: v83.15,68.55 82.3,67.7 R68.2
  Bottom 0.254: U4.24 89.09,70.04 88.87,69.82 88.23,69.82 87.6,69.18 86.33,69.18 85.69,68.55 v83.15,68.55
N$86  (via drill 0.5)
  Top 0.254: v83.15,66.01 84,66.86 C36.1
  Bottom 0.254: U4.25 89.74,69.42 89.5,69.18 88.87,69.18 88.23,68.55 86.96,68.55 85.69,67.28 C36.1 84,66.86 v83.15,66.01
N$87
  Bottom 0.254: U4.23 88.44,70.66 88.23,70.45 87.6,70.45 86.96,69.82 C37.1
N$88
  Bottom 0.254: U4.32 98.19,69.39 98.39,69.18 101.99,69.18 R69.1
N$89
  Bottom 0.254: U4.29 96.24,67.53 96.49,67.28 99.66,67.28 100.3,66.64 100.3,65.37 100.93,64.74 100.93,64.1 101.57,63.47 101.57,61.56 102.2,60.93 R70.1
N$90
  Top 0.254: R72.1 R73.1 R74.1 89.08,55.21 83.15,55.21 82.52,55.85 82.52,56.27 R75.2
N$91  (via drill 0.5)
  Top 0.254: C41.1 84.74,57.22 v84.74,58.07
  Bottom 0.254: U4.15 87.79,59.21 87.6,59.02 87.28,59.02 86.64,58.39 85.06,58.39 v84.74,58.07 84.74,57.22 C41.1
N$92  (via drill 0.5)
  Top 0.254: v88.87,59.02 87.38,59.02 R76.1
  Bottom 0.254: U4.14 88.44,59.45 v88.87,59.02 88.23,58.39 87.6,58.39 86.96,57.75 86.96,57.65 C42.1 86.54,57.33
N$93  (via drill 0.5)
  Top 0.254: R78.1 C43.1 83.47,59.13 v83.47,58.07
  Bottom 0.254: U4.16 87.14,59.83 86.33,59.02 84.64,59.02 C43.1 83.47,59.13 v83.47,58.07
N$94
  Bottom 0.254: U4.20 86.49,70.61 86.33,70.45 85.06,70.45 84,71.51 C44.1
UC2XB
  Top 0.254: U5.TX0 R1.2
V+  (via drill 0.5)  (4 unrouted)
  Top 0.203: v60.93,103.47 63.15,103.47 63.47,103.15 63.47,99.98 v63.15,99.66 | v103.47,125.7 103.47,123.47 103.16,123.16 99.98,123.16 v99.66,123.47 | v125.7,83.15 123.47,83.15 123.16,83.47 123.16,86.65 v123.47,86.96 | v83.15,60.93 83.15,63.15 83.47,63.47 86.64,63.47 v86.96,63.15
  Top 0.254: v63.15,99.66 C10.1 | C20.1 v99.66,123.47 | v123.47,86.96 C30.1 | v86.96,63.15 C40.1
  Top 0.381: C9.+ 63.47,87.74 | v64.1,86.96 62.83,85.69 | C19.+ 87.74,123.16 | v86.96,122.52 85.69,123.79 | C29.+ 123.16,98.89 | v122.52,99.66 123.79,100.93 | C39.+ 98.89,63.47 | v99.66,64.1 100.93,62.83
  Top 0.813: TP4.TP 73.31,85.84 73.45,86.01 v74.26,85.69 | TP9.TP 85.84,113.32 86.01,113.17 v85.69,112.36 | TP14.TP 113.31,100.79 113.17,100.61 v112.36,100.93 | TP19.TP 100.79,73.31 100.62,73.45 v100.93,74.26
  Top 1.016: 64.1,85.69 v74.26,85.69 | v85.69,112.36 85.69,122.52 | v112.36,100.93 122.52,100.93 | 100.93,64.1 v100.93,74.26 | JP1.2 TP21.TP 100.93,108.55 100.3,109.19 D1.A
  Bottom 0.254: U1.17 62.67,100.14 v63.15,99.66 | R20.2 60.08,104.32 v60.93,103.47 | U2.17 100.14,123.95 v99.66,123.47 | R39.2 104.32,126.55 v103.47,125.7 | U3.17 123.95,86.49 v123.47,86.96 | R58.2 126.55,82.3 v125.7,83.15 | U4.17 86.49,62.67 v86.96,63.15 | R77.2 82.3,60.08 v83.15,60.93
  Bottom 0.381: U1.36 74.12,85.84 v74.26,85.69 | U1.1 62.98,85.84 v64.1,86.96 | U2.36 85.84,112.51 v85.69,112.36 | U2.1 85.84,123.65 v86.96,122.52 | U3.36 112.51,100.79 v112.36,100.93 | U3.1 123.65,100.79 v122.52,99.66 | U4.36 100.79,74.12 v100.93,74.26 | U4.1 100.79,62.98 v99.66,64.1
  pour Top (no thermals): 65.37,85.06 60.29,85.06 60.29,100.93 65.37,100.93 65.37,98.39 62.2,98.39 62.2,90.77 65.37,90.77
  pour Top (no thermals): 85.06,121.25 85.06,126.33 100.93,126.33 100.93,121.25 98.39,121.25 98.39,124.43 90.77,124.43 90.77,121.25
  pour Top (no thermals): 121.25,101.57 126.33,101.57 126.33,85.69 121.25,85.69 121.25,88.23 124.43,88.23 124.43,95.85 121.25,95.85
  pour Top (no thermals): 101.57,65.37 101.57,60.29 85.69,60.29 85.69,65.37 88.23,65.37 88.23,62.2 95.85,62.2 95.85,65.37
V-  (via drill 0.5)  (4 unrouted)
  Top 0.254: v58.07,104.43 59.56,104.43 arc-90 C14.2 R21.2 64.84,104.32 65.06,104.11 65.06,103.15 66.01,102.2 66.01,101.06 C10.2 | v104.42,128.55 104.42,127.07 arc-90 C23.2 R40.2 104.32,121.79 104.11,121.57 103.16,121.57 102.2,120.62 101.06,120.62 C20.2 | v128.55,82.2 127.07,82.2 arc-90 C33.2 R59.2 121.78,82.3 121.57,82.52 121.57,83.47 120.62,84.42 120.62,85.56 C30.2 | v82.2,58.07 82.2,59.55 arc-90 C43.2 R78.2 82.3,64.84 82.52,65.06 83.47,65.06 84.42,66.01 85.56,66.01 C40.2
  Top 0.813: 74.26,93.31 v74.26,91.72 | 74.26,93.31 v74.26,94.9 | TP5.TP 74.26,93.31 | v91.73,112.36 93.31,112.36 | 93.31,112.36 v94.9,112.36 | 93.31,112.36 TP10.TP | 112.36,93.31 v112.36,94.9 | v112.36,91.72 112.36,93.31 | 112.36,93.31 TP15.TP | 93.31,74.26 v94.9,74.26 | 93.31,74.26 v91.73,74.26 | TP20.TP 93.31,74.26
  Top 1.016: JP1.1 106.01,106.65 TP22.TP
  Bottom 0.254: C12.2 56.9,104.32 57.01,104.43 v58.07,104.43 | C21.2 104.32,129.72 104.42,129.62 v104.42,128.55 | C31.2 129.72,82.3 129.62,82.2 v128.55,82.2 | C41.2 82.3,56.9 82.2,57 v82.2,58.07
  Bottom 0.381: U1.13 63.88,97.54 64.74,98.39 66.01,98.39 66.64,97.76 v66.64,93.95 | U2.13 97.54,122.74 98.39,121.89 98.39,120.62 97.76,119.98 v93.95,119.98 | U3.13 122.74,89.09 121.89,88.23 120.62,88.23 119.98,88.87 v119.98,92.68 | U4.13 89.09,63.88 88.23,64.74 88.23,66.01 88.87,66.64 v92.68,66.64
  other vias: 66.64,92.68 67.91,92.68 67.91,93.95 92.68,119.98 92.68,118.71 93.95,118.71 119.98,93.95 118.71,93.95 118.71,92.68 93.95,66.64 93.95,67.91 92.68,67.91
  pour Bottom (no thermals): 59.66,95.22 74.58,95.22 74.58,91.41 59.66,91.41
  pour Top (no thermals): 66.01,100.93 66.01,87.28 70.45,87.28 70.45,100.93
  pour Bottom (no thermals): 95.22,126.97 95.22,112.05 91.41,112.05 91.41,126.97
  pour Top (no thermals): 100.93,120.62 87.28,120.62 87.28,116.17 100.93,116.17
  pour Bottom (no thermals): 126.97,91.41 112.05,91.41 112.05,95.22 126.97,95.22
  pour Top (no thermals): 120.62,85.69 120.62,99.35 116.17,99.35 116.17,85.69
  pour Bottom (no thermals): 91.41,59.66 91.41,74.58 95.22,74.58 95.22,59.66
  pour Top (no thermals): 85.69,66.01 99.35,66.01 99.35,70.45 85.69,70.45
VR1  (via drill 0.5)
  Top 0.254: v69.82,83.15 70.77,82.2 74.9,82.2 75.22,82.52 75.22,88.87 74.9,89.18 72.04,89.18 71.72,89.5 71.72,99.03 72.04,99.35 v74.26,99.35
  Bottom 0.254: v69.82,83.15 68.97,82.3 R12.2 R11.2 R10.2 R13.2 60.83,82.2 58.39,82.2 C8.1 | v74.26,99.35 74.12,99.49 U1.21
VR2  (via drill 0.5)
  Top 0.254: v83.15,116.81 82.2,115.86 82.2,111.73 82.52,111.41 88.87,111.41 89.19,111.73 89.19,114.58 89.5,114.9 99.03,114.9 99.34,114.58 v99.34,112.36
  Bottom 0.254: v83.15,116.81 82.3,117.66 R31.2 R29.2 R28.2 R32.2 82.2,125.8 82.2,128.24 C18.1 | v99.34,112.36 99.49,112.5 U2.21
VR3  (via drill 0.5)
  Top 0.254: v116.81,103.47 115.86,104.43 111.73,104.43 111.41,104.11 111.41,97.76 111.73,97.44 114.58,97.44 114.9,97.12 114.9,87.6 114.58,87.28 v112.36,87.28
  Bottom 0.254: v116.81,103.47 117.66,104.32 R50.2 R48.2 R47.2 R51.2 125.8,104.43 128.24,104.43 C28.1 | v112.36,87.28 112.5,87.14 U3.21
VR4  (via drill 0.5)
  Top 0.254: v103.47,69.82 104.42,70.77 104.42,74.9 104.11,75.22 97.76,75.22 97.44,74.9 97.44,72.04 97.12,71.72 87.6,71.72 87.28,72.04 v87.28,74.26
  Bottom 0.254: v103.47,69.82 104.32,68.97 R69.2 R67.2 R66.2 R70.2 104.42,60.83 104.42,58.39 C38.1 | v87.28,74.26 87.14,74.12 U4.21
XB2UC  (via drill 0.5)
  Top 0.254: U5.RX1 79.98,104.11 v80.93,105.06
  Bottom 0.254: v80.93,105.06 86.96,105.06 87.6,104.43 87.6,86.01 87.28,85.69 85.82,85.69 XB1.2

## Text on the board
tDocu: 4pcb | v1.0 | 8-12-11 | scolton.blogspot.com